# Altium PCB Bevattningssystem Design 2.PcbDoc
Units mm, origin at the board's own origin, x right, y up, seen from the top; angles counter-clockwise.
Board outline 152.4 x 101.6 mm, 2 copper layers (Top Layer, Bottom Layer); 41 components, 30 nets, 155 pads, 8 vias.
Unrouted connection lines stored in the file: 23.
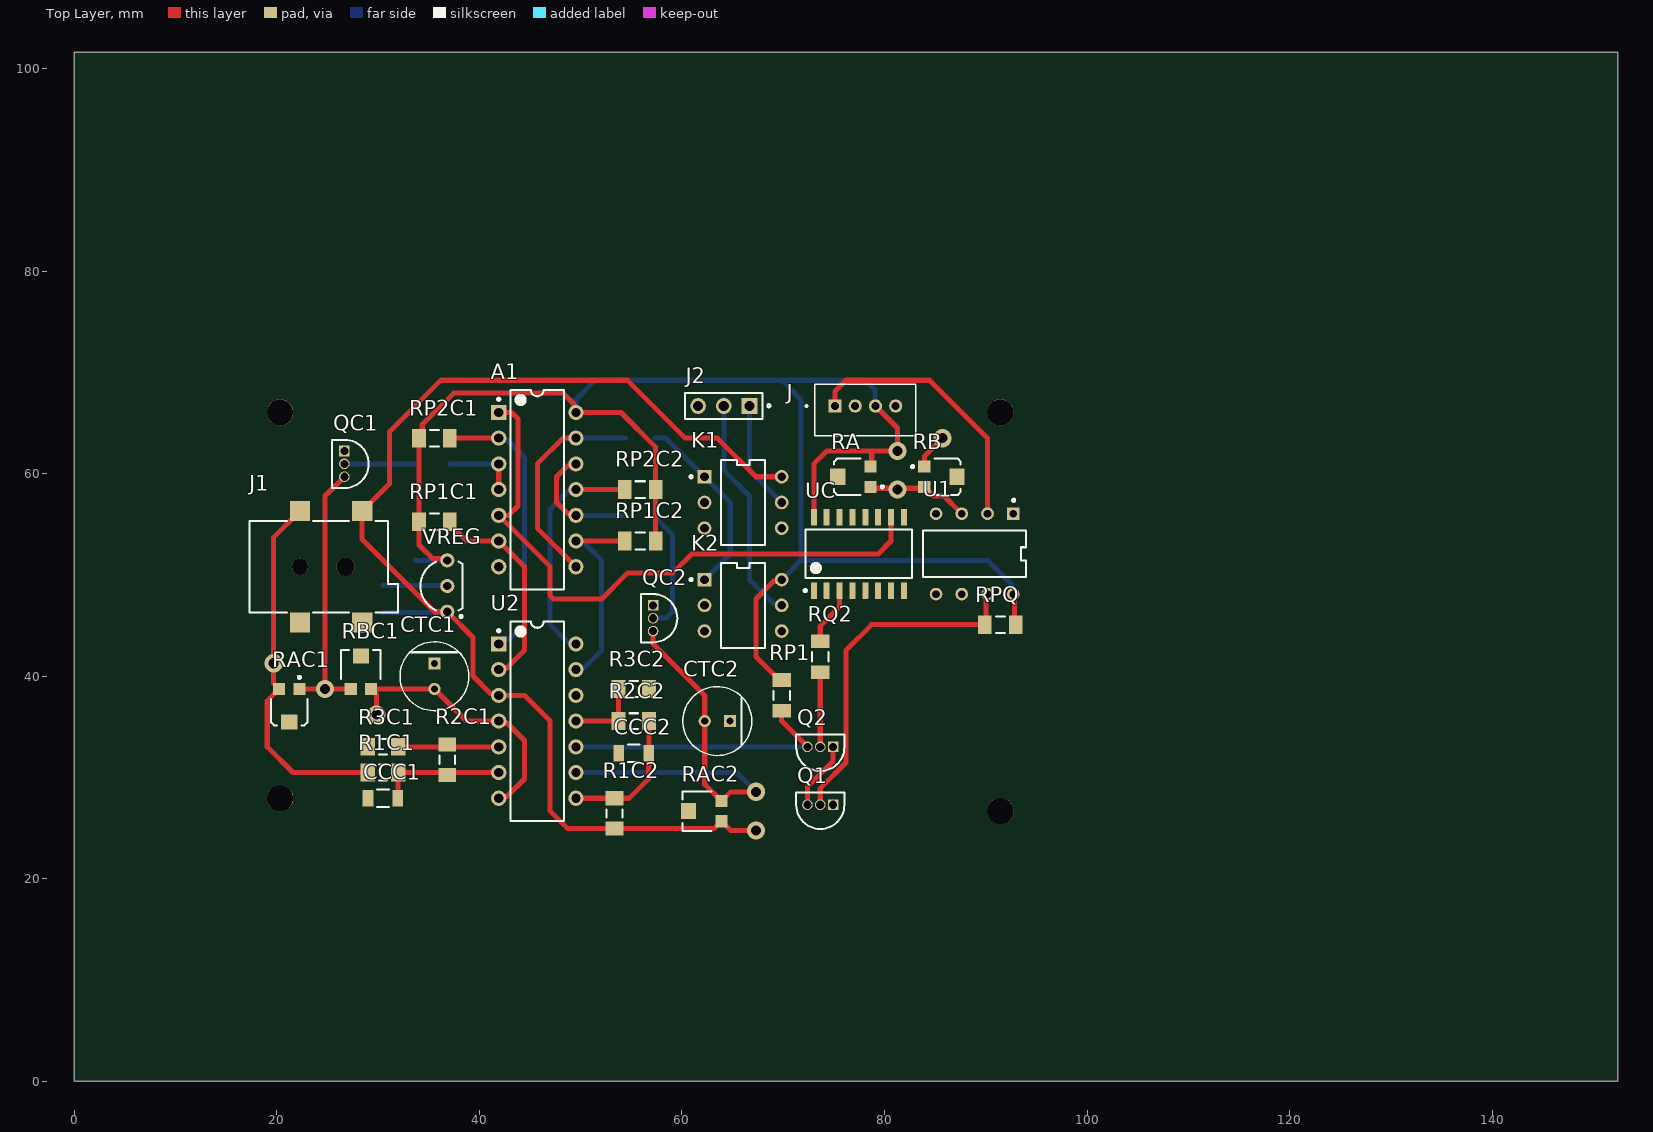
[diagram p0: Top Layer view]
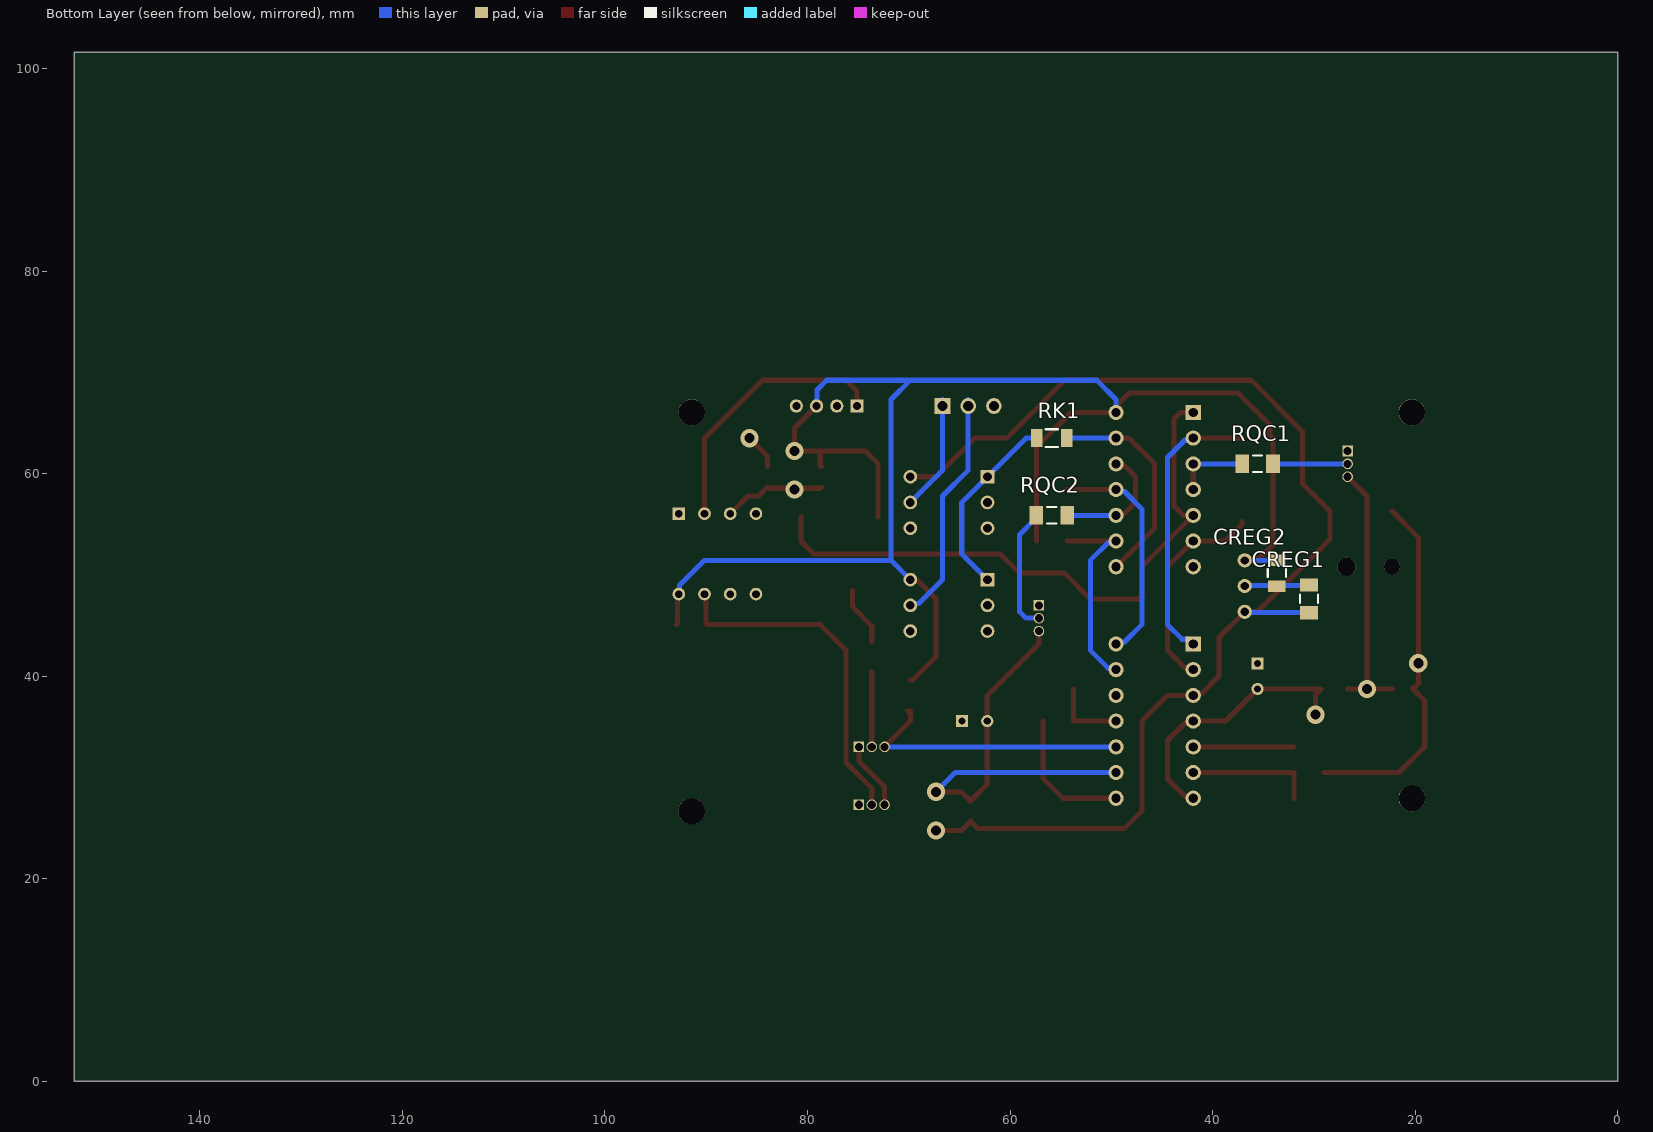
[diagram p1: Bottom Layer view, seen from below]
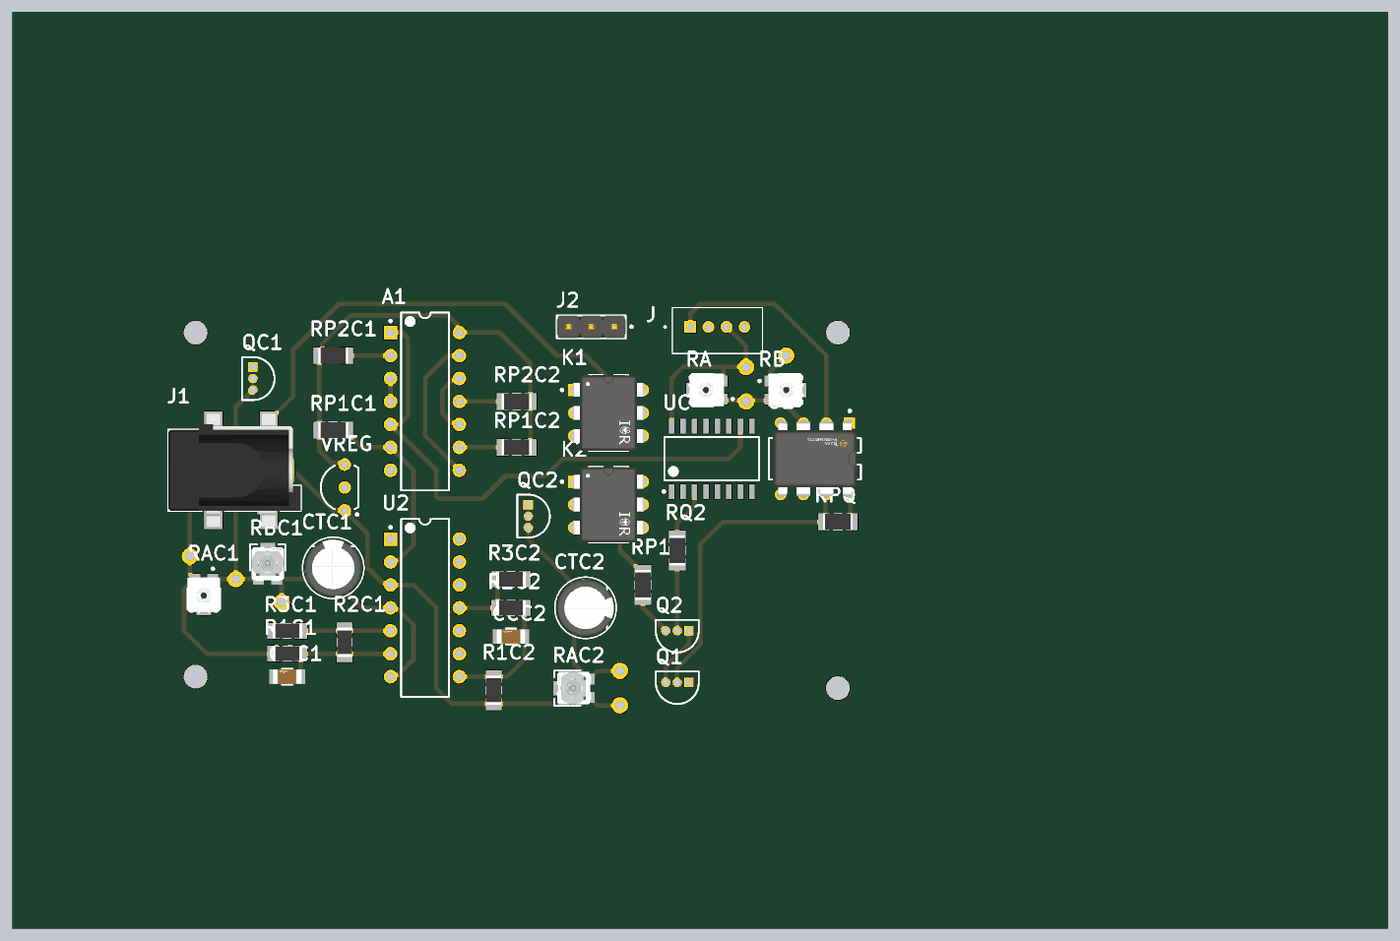
[diagram p2: 3D render of the assembled board from above, using the file's embedded part models]
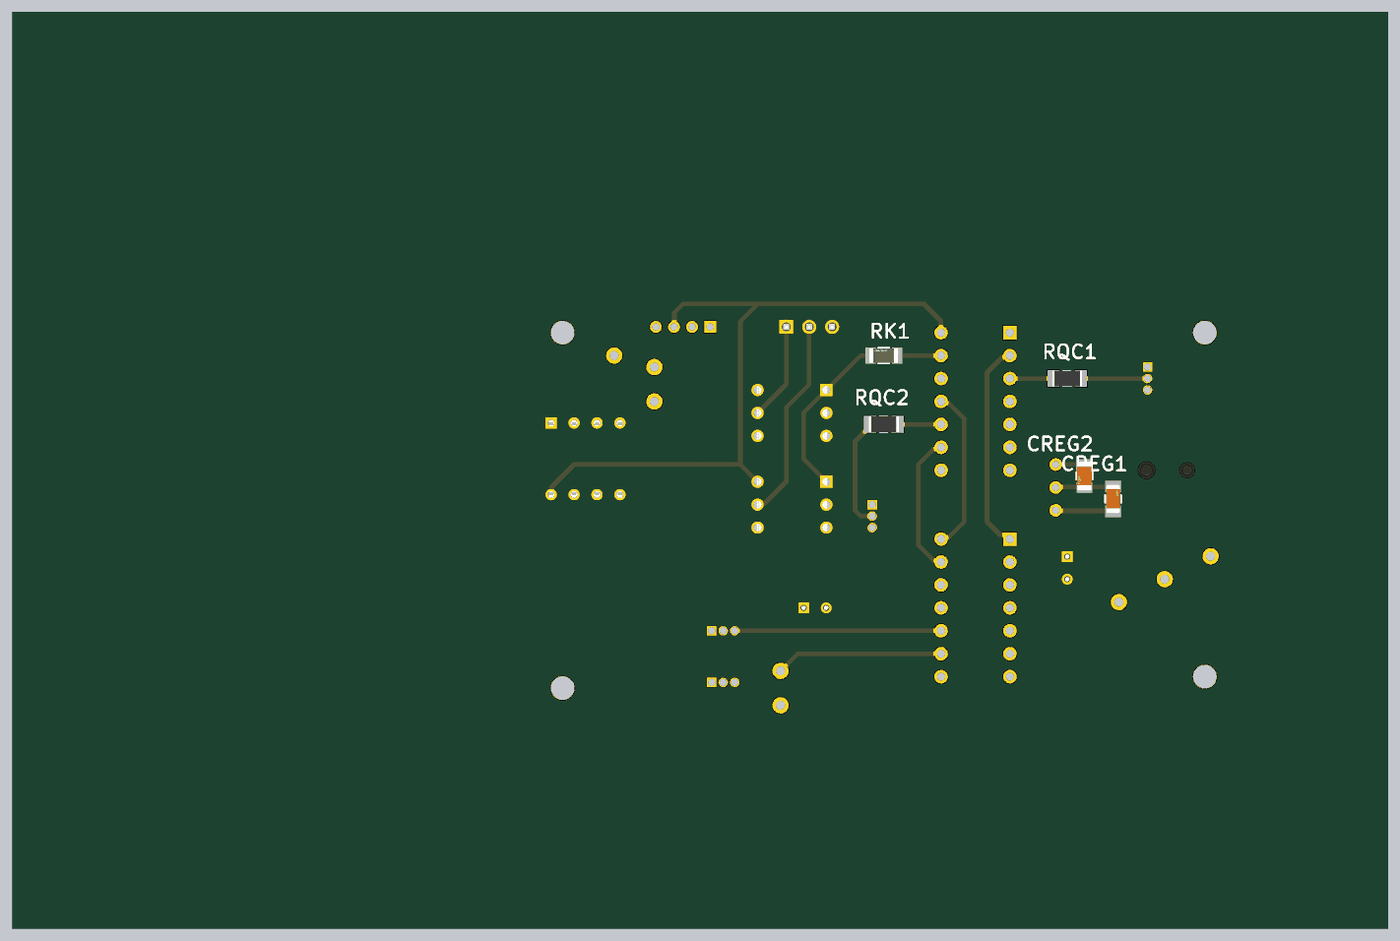
[diagram p3: 3D render of the assembled board from below, using the file's embedded part models]

## Layer stack, top to bottom
Top Solder: solder mask 0.0102, Solder Resist, Dk 3.5
Top Layer: signal copper 0.0356
Dielectric 1: dielectric 0.32, FR-4, Dk 4.8
Bottom Layer: signal copper 0.0356
Bottom Solder: solder mask 0.0102, Solder Resist, Dk 3.5

## Board outline
0,0 152.4,0 152.4,101.6 0,101.6

## Design rules (kind name [scope] priority, off if disabled: settings)
Clearance [All] p1: gap=0.5 ignorepadtopadclearanceinfootprint=FALSE
MinimumAnnularRing [All] p1: minimumring=0.5
PolygonConnect [All] p1: connectstyle=Relief reliefconductorwidth=0.254 reliefentries=4 polygonreliefangle="90 Angle" airgapwidth=0.254
RoutingVias [All] p1: holewidth=0.6 width=1 viastyle="Through Hole" minholewidth=0.6 minwidth=1 maxholewidth=0.6 maxwidth=1
SolderMaskExpansion [All] p1: expansion=0.102 istentingtop=FALSE
Width "Width PWR" [InNetClass('Power')] p1: maxlimit=0.5 minlimit=0.5 preferedwidth=0.5
Width [All] p2: maxlimit=0.5 minlimit=0.25 preferedwidth=0.5
30 further rules are at their usual default settings.

## Classes and differential pairs
net class RPQ_Nets: NetQ1_2 VCC5
net class J1_Nets: GND NetJ1_3 VCC
net class CREG2_Nets: GND VCC5
net class VREG_Nets: GND VCC VCC5
net class UC_Nets: GND NetRQ2_1 NetUC_1 NetUC_2 NetUC_4 NetUC_5 NetUC_6 NetUC_7 NetUC_9 NetUC_12 NetUC_13 NetUC_14 NetUC_15 "Signal Out c1" VCC5
net class U2_Nets: "Control c1" "Control c2" "Discharge c2" GND NetA1_2 NetA1_6 NetA1_9 NetA1_11 NetQ2_3 NetR2C1_2 NetR2C2_2 NetU2_3 NetU2_12 "Threshold c1" VCC
net class U1_Nets: GND NetQ1_2 NetRA_1 NetU1_1 NetU1_5 NetU1_8 Sensor VCC5
net class RQC2_Nets: NetQC2_2 ~QC2
net class RQC1_Nets: NetQC1_2 ~QC1
net class RQ2_Nets: NetQ2_2 NetRQ2_1
net class RP2C2_Nets: NetA1_11 VCC5
net class RP2C1_Nets: NetA1_2 VCC5
net class RP1C2_Nets: NetA1_9 VCC5
net class RP1C1_Nets: NetA1_6 VCC5
net class RP1_Nets: NetQ2_3 VCC5
net class RK1_Nets: NetK1_1 "Signal Out c2"
net class RBC1_Nets: "Discharge c1" NetRBC1_2 "Threshold c1"
net class RB_Nets: GND NetRA_1 NetRB_2
net class RAC2_Nets: "Discharge c2" NetRAC2_2 VCC
net class RAC1_Nets: "Discharge c1" NetRAC1_2 VCC
net class RA_Nets: NetRA_1 NetRA_2 VCC5
net class R3C2_Nets: GND NetR2C2_2
net class R3C1_Nets: GND NetR2C1_2
net class R2C2_Nets: "Control c2" NetR2C2_2
net class R2C1_Nets: "Control c1" NetR2C1_2
net class R1C2_Nets: "Control c2" VCC
net class R1C1_Nets: "Control c1" VCC
net class QC2_Nets: "Discharge c2" GND NetQC2_2
net class QC1_Nets: "Discharge c1" GND NetQC1_2
net class Q2_Nets: NetQ1_3 NetQ2_2 NetQ2_3
net class Q1_Nets: GND NetQ1_2 NetQ1_3
net class K2_Nets: GND NetJ2_2 NetK1_1 NetK2_3 VCC5
net class K1_Nets: GND NetJ2_1 NetK1_1 VCC
net class J_Nets: GND Sensor VCC5
net class J2_Nets: GND NetJ2_1 NetJ2_2
net class CREG1_Nets: GND NetJ1_3 VCC
net class CTC2_Nets: "Discharge c2" GND
net class CTC1_Nets: GND "Threshold c1"
net class CCC2_Nets: "Control c2" GND
net class CCC1_Nets: "Control c1" GND
net class A1_Nets: GND NetA1_2 NetA1_6 NetA1_9 NetA1_11 "Signal Out c1" "Signal Out c2" VCC5 ~QC1 ~QC2

## Components (designator, comment, footprint, x,y, rotation, side; value= is the part's Value field where it differs from the comment)
A1 "SN74HCT02N" N0014A 45.72,58.42 r0 top
CCC1 "GCM3195C2A103JA16D" FP-GCM319-0_15-MFG 30.48,27.94 r180 top
CCC2 "GCM3195C2A103JA16D" FP-GCM319-0_15-MFG 55.245,32.385 r180 top
CREG1 "GCM31MR91H334KA37L" FP-GCM31M-0_15-IPC_B 30.48,47.625 r90 bottom value=330nF
CREG2 "GRM31C5C1H104JA01L" FP-GRM31C-0_2-e0_3_0_8-IPC_C 33.655,50.165 r270 bottom value=100nF
CTC1 "ECA1EHG101I" FP-RAD-TH-D_6_3_0_5-L_11-MFG 35.56,39.985 r270 top
CTC2 "ECA1EHG101I" FP-RAD-TH-D_6_3_0_5-L_11-MFG 63.5,35.56 r180 top
J "Grove B4B" SEEED_110990030 78.105,66.675 r0 top
J1 "694106106102" 694106106102 24.13,50.8 r270 top
J2 "90120-0763" FP-90120-0763-MFG 64.135,66.675 r180 top
K1 "PVT412LPBF" FP-PG-DIP-6-MFG 66.04,57.15 r0 top
K2 "PVT412LPBF" FP-PG-DIP-6-MFG 66.04,46.99 r0 top
Q1 "2N3904BU" FAIR-TO-92 74.93,27.305 r180 top
Q2 "2N3904BU" FAIR-TO-92 74.93,33.02 r180 top
QC1 "2N3904BU" FAIR-TO-92 26.67,62.23 r270 top
QC2 "2N3904BU" FAIR-TO-92 57.15,46.99 r270 top
R1C1 "Resistor 4k7 +/-1% 1206 250 mW" RESC3116X70X50ML13T20 30.48,30.48 r0 top value=4.7k
R1C2 "Resistor 4k7 +/-1% 1206 250 mW" RESC3116X70X50ML13T20 53.34,26.44 r90 top value=4.7k
R2C1 "Resistor 4k7 +/-1% 1206 250 mW" RESC3116X70X50ML13T20 36.83,31.75 r90 top value=4.7k
R2C2 "Resistor 4k7 +/-1% 1206 250 mW" RESC3116X70X50ML13T20 55.245,35.56 r180 top value=4.7k
R3C1 "Resistor 4k7 +/-1% 1206 250 mW" RESC3116X70X50ML13T20 30.48,33.02 r180 top value=4.7k
R3C2 "Resistor 4k7 +/-1% 1206 250 mW" RESC3116X70X50ML13T20 55.245,38.735 r0 top value=4.7k
RA "TC33X-2-103E" BOUR-TC33X-2_V 76.835,59.69 r180 top value=10k
RAC1 "TC33X-2-103E" BOUR-TC33X-2_V 21.225,36.935 r270 top value=10k
RAC2 "TC33X-2-104E" FP-TC33X-2-MFG 62.23,26.67 r90 top value=100k
RB "TC33X-2-103E" BOUR-TC33X-2_V 85.725,59.69 r0 top value=10k
RBC1 "TC33X-2-104E" FP-TC33X-2-MFG 28.305,40.41 r0 top value=100k
RK1 "RC3216J221CS" FP-RC3216-IPC_B 55.88,63.5 r0 bottom value=220
RP1 "Resistor 10k +/-1% 1206 250 mW" RESC3216X60X45ML15T20 69.85,38.1 r270 top value=10k
RP1C1 "Resistor 10k +/-1% 1206 250 mW" RESC3216X60X45ML15T20 35.56,55.245 r0 top value=10k
RP1C2 "Resistor 10k +/-1% 1206 250 mW" RESC3216X60X45ML15T20 55.88,53.34 r180 top value=10k
RP2C1 "Resistor 10k +/-1% 1206 250 mW" RESC3216X60X45ML15T20 35.56,63.5 r0 top value=10k
RP2C2 "Resistor 10k +/-1% 1206 250 mW" RESC3216X60X45ML15T20 55.88,58.42 r180 top value=10k
RPQ "Resistor 10k +/-1% 1206 250 mW" RESC3216X60X45ML15T20 91.44,45.085 r180 top value=10k
RQ2 "Resistor 10k +/-1% 1206 250 mW" RESC3216X60X45ML15T20 73.66,41.91 r270 top value=10k
RQC1 "Resistor 10k +/-1% 1206 250 mW" RESC3216X60X45ML15T20 35.56,60.96 r180 bottom value=10k
RQC2 "Resistor 10k +/-1% 1206 250 mW" RESC3216X60X45ML15T20 55.88,55.88 r0 bottom value=10k
U1 "LM311P" FP-P0008A-MFG 88.9,52.07 r270 top
U2 "LM339AN" TI-N0014A 45.72,35.56 r0 top
UC "CD4020BNSR" NS0016A_N 77.47,52.07 r90 top
VREG "UA78M05CKCSE3" LP3 36.83,48.895 r0 top

## Footprints (in the part's own frame and the unit in brackets; to place one, negate y for a bottom-side part, rotate by r counter-clockwise, add the part's x,y. Pads: shape width x height; smd on the part's side, far side on the other; paste and mask are expansions set on the pad)
694106106102 [mm] "DC Power Jack Right Angled SMT ?6.4 with 4 soldering pads & pegs"
  rect 2x2 smd: 1(-5.5,4.3) 1(-5.5,-1.85) 2(5.5,-1.85) 3(5.5,4.3)
  round 1.6 hole 1.6 unplated: MH1(0,-1.85)
  round 1.8 hole 1.8 unplated: MH2(0,2.65)
  silkscreen extent -4.5,-6.85 4.5,7.85, body extent -6.25,-6.85 6.25,7.85, height 11.05
BOUR-TC33X-2_V [mm] "SMD, 3-Leads, Body 3.8x3.6mm"
  rect 1.2x1.2 smd: 1(-1.8,1) 3(-1.8,-1)
  rect 1.5x1.6 smd: 2(1.45,0)
  silkscreen extent -3.08,-1.8 1.8,1.8, body extent -2,-1.8 1.96,1.8, height 1.15
FAIR-TO-92 [mm] "TO, 3-Leads, Body Dia 4.79mm, Pitch 1.27mm"
  rect 1.05x1.05 hole 0.8 mask+0.05: 1(0,0)
  round 1.05 hole 0.8 mask+0.05: 2(1.27,0) 3(2.54,0)
  silkscreen extent -1.11,-1.21 3.65,2.4, body extent -1.11,-1.21 3.65,2.4, height 5.33
FP-90120-0763-MFG [mm]
  rect 1.55x1.55 hole 1 paste-2539.97 mask+0: 1(-2.54,0)
  round 1.55 hole 1 paste-2539.97 mask+0: 2(0,0) 3(2.54,0)
  silkscreen extent -4.58,-1.27 3.81,1.27, body extent -3.91,-1.37 3.91,1.37, height 0.25
FP-GCM31M-0_15-IPC_B [mm]
  rect 1.306x1.758 smd paste+0 mask+0: 1(-1.376,0) 2(1.376,0)
  silkscreen extent -0.42,-0.88 0.42,0.88, body extent -1.6,-0.8 1.6,0.8, height 1.25
FP-GCM319-0_15-MFG [mm]
  rect 1.05x1.6 smd paste+0 mask+0: 1(-1.475,0) 2(1.475,0)
  silkscreen extent -0.58,-0.87 0.58,0.87, body extent -2.1,-0.97 2.1,0.97, height 0.25
FP-GRM31C-0_2-e0_3_0_8-IPC_C [mm]
  rect 1.155x1.706 smd paste+0 mask+0: 1(-1.276,0) 2(1.276,0)
  silkscreen extent -0.4,-0.9 0.4,0.9, body extent -1.6,-0.8 1.6,0.8, height 1.8
FP-P0008A-MFG [mm]
  rect 1.25x1.25 hole 0.75 paste-1000 mask+0: 1(-3.97,3.81)
  round 1.25 hole 0.75 paste-1000 mask+0: 2(-3.97,1.27) 3(-3.97,-1.27) 4(-3.97,-3.81) 5(3.97,-3.81) 6(3.97,-1.27) 7(3.97,1.27) 8(3.97,3.81)
  silkscreen extent -5.42,-5.08 2.3,5.08, body extent -4.69,-5.18 4.69,5.18, height 0.25
FP-PG-DIP-6-MFG [mm]
  rect 1.35x1.35 hole 0.85 paste-2539.97 mask+0: 1(-3.81,2.54)
  round 1.35 hole 0.85 paste-2539.97 mask+0: 2(-3.81,0) 3(-3.81,-2.54) 4(3.81,-2.54) 5(3.81,0) 6(3.81,2.54)
  silkscreen extent -5.26,-4.19 2.17,4.19, body extent -4.58,-4.54 4.58,4.54, height 0.25
FP-RAD-TH-D_6_3_0_5-L_11-MFG [mm]
  rect 1.2x1.2 hole 0.7 paste-2539.97 mask+0: 1(-1.25,0)
  round 1.2 hole 0.7 paste-2539.97 mask+0: 2(1.25,0)
  silkscreen extent -3.4,-3.4 3.4,3.4, body extent -3.5,-3.5 3.5,3.5, height 0.25
FP-RC3216-IPC_B [mm]
  rect 1.155x1.758 smd paste+0 mask+0: 1(-1.476,0) 2(1.476,0)
  silkscreen extent -0.6,-0.88 0.6,0.88, body extent -1.6,-0.8 1.6,0.8, height 0.65
FP-TC33X-2-MFG [mm]
  rect 1.2x1.2 smd paste+0 mask+0: 1(-1,-1.675) 3(1,-1.675)
  rect 1.6x1.5 smd paste+0 mask+0: 2(0,1.575)
  silkscreen extent -1.95,-0.7 1.95,2.18, body extent -2.05,-2.37 2.05,2.42, height 0.25
LP3 [mm] "TO, Flat Index; 3 In-Line, Formed Axial Leads; Body Dia. 4.8mm; Leads 0.56 x 0.41 mm (max)"
  round 1.4 hole 0.8: 1(0,-2.54) 2(0,0) 3(0,2.54)
  silkscreen extent -2.65,-3.13 1.52,2.41, body extent -2.65,-2.66 1.52,2.66, height 9.33
N0014A [mm] "DIP, 14-Leads, Body 19.7x6.6mm, Pitch 2.54mm"
  rect 1.5x1.5 hole 0.9: 1(-3.81,7.62)
  round 1.5 hole 0.9: 2(-3.81,5.08) 3(-3.81,2.54) 4(-3.81,0) 5(-3.81,-2.54) 6(-3.81,-5.08) 7(-3.81,-7.62) 8(3.81,-7.62) 9(3.81,-5.08) 10(3.81,-2.54) 11(3.81,0) 12(3.81,2.54) 13(3.81,5.08) 14(3.81,7.62)
  silkscreen extent -3.93,-9.85 2.65,9.85, body extent -3.95,-9.85 3.95,9.85, height 5.08
NS0016A_N [mm] "SOIC,16-Leads,Body 10.5x5.6mm,Pitch 1.27mm,IPC Medium Density"
  rrect17% 1.65x0.6 smd: 1(-3.625,4.445) 2(-3.625,3.175) 3(-3.625,1.905) 4(-3.625,0.635) 5(-3.625,-0.635) 6(-3.625,-1.905) 7(-3.625,-3.175) 8(-3.625,-4.445) 9(3.625,-4.445) 10(3.625,-3.175) 11(3.625,-1.905) 12(3.625,-0.635) 13(3.625,0.635) 14(3.625,1.905) 15(3.625,3.175) 16(3.625,4.445)
  silkscreen extent -3.75,-5.25 2.4,5.42, body extent -2.8,-5.25 2.8,5.25, height 2
RESC3116X70X50ML13T20 [mm] "Chip Resistor, 2-Leads, Body 3.25x1.65mm, IPC Low Density"
  rect 1.4x1.75 smd: 1(-1.5,0) 2(1.5,0)
  silkscreen extent -0.4,-0.78 0.4,0.78, body extent -1.63,-0.82 1.63,0.82, height 0.7
RESC3216X60X45ML15T20 [mm] "Chip Resistor, 2-Leads, Body 3.3x1.75mm, IPC Low Density"
  rect 1.35x1.85 smd: 1(-1.525,0) 2(1.525,0)
  silkscreen extent -0.45,-0.82 0.45,0.82, body extent -1.65,-0.87 1.65,0.87, height 0.6
SEEED_110990030 [mm]
  rect 1.308x1.308 hole 0.8: 1(-3,0)
  round 1.308 hole 0.8: 2(-1,0) 3(1,0) 4(3,0)
  silkscreen extent -5.9,-2.95 5,2.15
TI-N0014A [mm] "DIP, 14-Leads, Body 19.7x6.6mm, Pitch 2.54mm"
  rect 1.5x1.5 hole 0.9: 1(-3.81,7.62)
  round 1.5 hole 0.9: 2(-3.81,5.08) 3(-3.81,2.54) 4(-3.81,0) 5(-3.81,-2.54) 6(-3.81,-5.08) 7(-3.81,-7.62) 8(3.81,-7.62) 9(3.81,-5.08) 10(3.81,-2.54) 11(3.81,0) 12(3.81,2.54) 13(3.81,5.08) 14(3.81,7.62)
  silkscreen extent -3.93,-9.85 2.65,9.85, body extent -3.95,-9.85 3.95,9.85, height 5.08

## Part data
A1: library part CMP-016-00012-1, "NOR Gate, HCT Series, 4-Func, 2-Input, CMOS, PDIP14", Case/Package=DIP, Load Capacitance (CL)=50pF, Max Operating Temperature=85°C, Max Supply Voltage=5.5V, Min Operating Temperature=-40°C, Min Supply Voltage=4.5V, Nominal Supply Voltage=5V, Package Body Material=Plastic, Package Equivalence Code=DIP14,.3, Package Shape=Rectangular, Package Style=IN-LINEMeter, Temperature Grade=INDUSTRIAL, Channels=4, Height - Seated (Max)=5.08mm, JESD-30 Code=R-PDIP-T14, JESD-609 Code=e4, Length=19.305mm, Logic Type="NOR GATE", Max I(ol)=4mA, Number of Inputs=2, Packaging=Rail/Tube, Pins=14, Power Supplies=5V, Prop. Delay@Nom-Sup=25ns, Propagation Delay (tpd)=25ns, Qualification Status="Not Qualified", Reach SVHC Compliant=Yes, RoHS Compliant=Yes, Schmitt Trigger=No, Surface Mount=No, Technology=CMOS, Terminal Finish=Nickel, Terminal Form="Through Hole", Terminal Pitch=2.54mm, Terminal Position=DUAL, Width=7.62mm
CCC1 CCC2: library part CMP-06035-000082-2, "Ceramic Capacitor for Automotive 10nF ±5% 100VDC C0G 1206 Paper T/R", Capacitance=10nF, Case Code (Imperial)=1206, Case Code (Metric)=3216, Dielectric=C0G, Max Operating Temperature=125°C, Min Operating Temperature=-55°C, Package Quantity=1, Ratings=AEC-Q200, Tolerance=5%, Voltage Rating=100V, Case/Package=1206, Depth=1.6mm, Height=0.85mm, Lead Free="Lead Free", Length=3.2mm, Mount="Surface Mount", Packaging="Tape and Reel", Radiation Hardening=No, Termination=SMD/SMT, Thickness=0.037inch, Voltage Rating (DC)=100V, Width=0.063inch
CREG1: library part CMP-001-00102-1, "Ceramic Capacitor, Multilayer, Ceramic, 50V, 10% +Tol, 10% -Tol, X8R, 15% TC, 0.33uF, Surface Mount, 1206", Capacitor Type=Ceramic, Case/Package=1206, Max Operating Temperature=150°C, Min Operating Temperature=-55°C, Package Shape=Rectangular, Rated DC Voltage (URdc)=50V, Temperature Characteristics Code=X8R, Tolerance  (fill in as +-)=10%, Dielectric Material=Ceramic, JESD-609 Code=e3, Mounting Technology="Surface Mount", Multilayer=Yes, Packaging="Tape and Reel", Pins=2, Reach SVHC Compliant=Yes, Reference Standard=AEC-Q200, RoHS Compliant=Yes, Terminal Finish=Nickel, Termination=Wraparound, Tolerance (fill in as +-)=10%
CREG2: library part CMP-001-00099-1, "Ceramic Capacitor, Non-polarized, Multilayer, Ceramic, 50V, 5% +Tol, 5% -Tol, C0G, 30ppm/Cel TC, 0.1uF, Surface Mount, 1206", Capacitor Type=Ceramic, Case/Package=1206, Max Operating Temperature=125°C, Min Operating Temperature=-55°C, Package Shape=Rectangular, Package Style=SMTMeter, Rated DC Voltage (URdc)=50V, Temperature Characteristics Code=C0G, Tolerance  (fill in as +-)=5%, Dielectric Material=Ceramic, Height=1.6mm, JESD-609 Code=e3, Length=3.2mm, Mounting Technology="Surface Mount", Multilayer=Yes, Packaging="Tape and Reel", Pins=2, Polarity=Non-Polarized, Reach SVHC Compliant=Yes, RoHS Compliant=Yes, Terminal Finish=Nickel, Termination=Wraparound, Tolerance (fill in as +-)=5%, Width=1.6mm
CTC1 CTC2: library part CMP-05427-000141-1, "Aluminum Electrolytic Capacitors (Radial Lead Type) AEC-Q200 Qualified 100uF ±20% 25V", Capacitance=100uF, Case/Package=Radial, Max Operating Temperature=105°C, Min Operating Temperature=-55°C, Package Quantity=2000, Ripple Current=130mA, Tolerance=20%, Voltage Rating=25V, Construction=RADIAL, Contact Plating=Tin, Diameter=6.3mm, Height=11.2mm, Height - Seated (Max)=0.48inch, Lead Diameter=0.5mm, Lead Pitch=2.5mm, Lead/Base Style=Straight, Length=11.2mm, Life (Hours)=1000Hour, Mount="Through Hole", Packaging="Ammo Pack", Radiation Hardening=No, RoHS Compliant=Yes, Series=NHG, Termination=Radial, Voltage Rating (DC)=25V, Width=6.3mm
J: "GROVE 2MM 4PIN VERT CONN 10PCS", Package=None, Arrow_Electronics-Purchase-URL=https://snapeda.com/shop?store=Arrow+Electronics&id=583576, Availability=Good, MF="Seeed Technology", Mouser-Purchase-URL=https://snapeda.com/shop?store=Mouser&id=583576, MP=110990030, Price=None, SnapEDA_Link=https://www.snapeda.com/parts/110990030/Seeed%20Technology%20Co.,%20Ltd/view-part/583576/?ref=snap
J1: library part CMP-1502-00177-3, Color=Black, Current Rating=5A, Flammability Rating="UL94 V-0", Insulation Resistance=100MΩ, Max Operating Temperature=85°C, Min Operating Temperature=-40°C, Operating Supply Voltage=24V, Connector Type=Power, Contact Gender=Female, Contact Material="Gold, Tin", Contact Plating=Tin, Gender=Male, Height=11.5mm, Housing Material=Polyamide, Mount="Surface Mount", NexarPartId=52645184, Number of Contacts=3, Packaging="Tape and Reel", REACH SVHC=Unknown, RoHS=Compliant, Shielding=Unshielded, Termination=SMD/SMT, Voltage Rating=24V, Voltage Rating (DC)=24V
J2: library part CMP-04776-000084-1, "CONN HEADER VERT 3POS 2.54MM", Current Rating=3A, Manufacturer=Molex, Temperature="-55°C to +125°C", Temperature Range High=+125°C, Temperature Range Low=-55°C, Voltage Rating=350V, Automotive=No, Category=Conn, ComponentLink2Description=Datasheet, ComponentLink2URL=https://www.molex.com/webdocs/datasheets/pdf/en-us/0901200763_PCB_HEADERS.pdf, Conn Gender=Male, Conn Orientation=Vertical, Contact Material=Gold,Nickel, Device Class L1=Connectors, Device Class L2="Headers and Wire Housings", Device Class L3=unset, Digikey Description="CONN HEADER VERT 3POS 2.54MM", Footprint Url=https://www.molex.com/pdm_docs/sd/901200763_sd.pdf, Height=5.8mm, Lead Free=Yes, Manufacturer Part Number=90120-0763, Mouser Description="Board-To-Board Connector, C-Grid III 90120 Series, Through Hole, Header, 3, 2.54 mm", Number of Contacts=3, Number Of Rows=1, Octopart=https://octopart.com/90120-0763-molex-655433, Package=90120-0763, Pitch=2.54mm, RoHS=TRUE
K1 K2: library part CMP-00196-65875632-1, "PVT412LPBF PVT Photovoltaic 400 V 0.12 A 35 Ohm SPST (1 Form A) Solid State Relay - DIP-6", Ambient Temperature Range High=85°C, Capacitance=12pF, Case/Package=DIP, Forward Current=25mA, Input Current=3mA, Insulation Resistance=10GΩ, Isolation Voltage=4kV, Load Current=120mA, Max Output Voltage=400V, Min Operating Temperature=-40°C, On-State Resistance=35Ω, Package Quantity=2000, Approvals=UL, Fall Time=500µs, Height=3.42mm, Lead Free="Contains Lead", Length=8.63mm, Lifecycle Status=Production, Max Input Current=25mA, Max Operating Temperature=85°C, Max Supply Voltage=400V, Mount="PCB, Through Hole", NexarPartId=65875632, Number of Channels=1, Number of Contacts=1, Number of Pins=6, Number of Poles=1, Output Current=120mA, Output Voltage=400V, Radiation Hardening=No, REACH SVHC="No SVHC", Relay Type=Relay, Resistance=35Ω, Rise Time=2ms, RMS Current (Irms)=120mA, RoHS=Compliant, Schedule B=8541408000, Termination="PC Pin", Throw Configuration="SP, SPST", Width=6.47mm
Q1 Q2 QC1 QC2: library part CMP-013-00040-1, "Small Signal Bipolar Transistor, 0.2A I(C), 40V V(BR)CEO, 1-Element, NPN, Silicon, TO-92", Collector-emitter Voltage-Max=40V, DC Current Gain-Min (hFE)=30, Frequency=300MHz, Max Collector Current=200mA, Max Operating Temperature=150°C, Package Body Material=Plastic, Package Shape=Round, Package Style=CYLINDRICALMeter, Power Dissipation-Max (Abs)=350mW, JEDEC-95 Code=TO-92, JESD-30 Code=O-PBCY-T3, Number of Elements=1, Pins=3, Polarity/Channel Type=NPN, Qualification Status="Not Qualified", Reach SVHC Compliant=Yes, RoHS Compliant=Yes, Surface Mount=No, Terminal Form="Through Hole", Terminal Position=BOTTOM, Transistor Application=SWITCHING, Transistor Element Material=SILICON, Turn-off Time-Max (toff)=250ns, Turn-on Time-Max (ton)=70ns
R1C1 R1C2 R2C1 R2C2 R3C1 R3C2: library part CMP-009-00033-5, "Chip Resistor, 4.7 KOhm, +/- 1%, 0.25 W, -55 to 155 degC, 1206 (3216 Metric)", Case/Package=1206, Max Operating Temperature=155°C, Min Operating Temperature=-55°C, Power=250mW, Tolerance=1%, Voltage Rating=200V, Mounting Technology=SM, Pins=2, RoHS Compliant=True
RA RAC1 RB: library part CMP-009-00213-1, "Trimmer, 0.1W, 10000ohm, 50V, 25% +/-Tol, -250,250ppm/Cel, 1 Turn(s), 1215", Case/Package=1215, Manufacturer Series=TC33, Max Operating Temperature=100°C, Min Operating Temperature=-40°C, Package Height=1.2mm, Package Length=3mm, Package Shape=Rectangular, Package Width=3.8mm, Power=100mW, Rated Temperature=70°C, Resistance Law=Linear, Resistor Type=TRIMMER, Temperature Coefficient (ppm/Cel)=-250,250, Tolerance=25%, Working Voltage=50V, Actuator Orientation=Vertical, Actuator Type=SCREW, Construction="Trimmer Pot", JESD-609 Code=e3, Mounting Technology="Surface Mount", Number of Turns=1, Packaging="Tape and Reel", Pins=3, Reach SVHC Compliant=Yes, RoHS Compliant=Yes, Series=TC33, Terminal Finish=Nickel, Termination=Wraparound
RAC2 RBC1: library part CMP-009-00214-1, "Trimmer, 0.1W, 100000ohm, 50V, 25% +/-Tol, -250,250ppm/Cel, 1 Turn(s), 1215", Case/Package=1215, Manufacturer Series=TC33, Max Operating Temperature=100°C, Min Operating Temperature=-40°C, Package Height=1.2mm, Package Length=3mm, Package Shape=Rectangular, Package Width=3.8mm, Power=100mW, Rated Temperature=70°C, Resistance Law=Linear, Resistor Type=TRIMMER, Temperature Coefficient (ppm/Cel)=-250,250, Tolerance=25%, Working Voltage=50V, Actuator Orientation=Vertical, Actuator Type=SCREW, Construction="Trimmer Pot", JESD-609 Code=e3, Mounting Technology="Surface Mount", Number of Turns=1, Packaging="Tape and Reel", Pins=3, Reach SVHC Compliant=Yes, RoHS Compliant=Yes, Series=TC33, Terminal Finish=Tin, Termination=Wraparound
RK1: library part CMP-009-00212-1, "Fixed Resistor, Metal Glaze/thick Film, 0.25W, 220ohm, 200V, 5% +/-Tol, 100ppm/Cel, Surface Mount, 1206", Case/Package=1206, Max Operating Temperature=155°C, Min Operating Temperature=-55°C, Package Height=0.55mm, Package Length=3.2mm, Package Shape=Rectangular, Package Width=1.6mm, Power=250mW, Rated Temperature=70°C, Resistor Type="FIXED RESISTOR", Temperature Coefficient (ppm/Cel)=100, Tolerance=5%, Working Voltage=200V, Construction=Chip, JESD-609 Code=e3, Mounting Technology="Surface Mount", Packaging="Tape and Reel", Pins=2, Reach SVHC Compliant=Yes, RoHS Compliant=Yes, Technology="METAL GLAZE/THICK FILM", Terminal Finish=Nickel
RP1 RP1C1 RP1C2 RP2C1 RP2C2 RQ2 RQC1 RQC2: library part CMP-009-00016-5, "Chip Resistor, 10 KOhm, +/- 1%, 0.25 W, -55 to 155 degC, 1206 (3216 Metric)", Case/Package=1206, Max Operating Temperature=155°C, Min Operating Temperature=-55°C, Power=250mW, Tolerance=1%, Voltage Rating=200V, Mounting Technology=SM, Pins=2, RoHS Compliant=True
RPQ: library part CMP-009-00016-5, "RP AND PQ1.  / Chip Resistor, 10 KOhm, +/- 1%, 0.25 W, -55 to 155 degC, 1206 (3216 Metric)", Case/Package=1206, Max Operating Temperature=155°C, Min Operating Temperature=-55°C, Power=250mW, Tolerance=1%, Voltage Rating=200V, Mounting Technology=SM, Pins=2, RoHS Compliant=True
U1: library part CMP-1685-00016-2, Ambient Temperature Range High=70°C, Case Code (Imperial)=0603, Case Code (Metric)=1608, Case/Package=PDIP, Dual Supply Voltage=9V, Input Bias Current=250nA, Input Offset Voltage (Vos)=2mV, Manufacturer Lifecycle Status=ACTIVE, Max Dual Supply Voltage=15V, Max Junction Temperature (Tj)=150°C, Max Output Voltage=7.5mV, Max Power Dissipation=500mW, Max Supply Current=7.5mA, Max Supply Voltage=30V, Min Dual Supply Voltage=1.75V, Min Operating Temperature=0°C, Min Supply Voltage=3.5V, Operating Supply Voltage=28V, Output Current=50mA, Power Rating=100mW, Resistance=390Ω, Tolerance=1%, Voltage Gain=106.02dB, Voltage Rating=75V, Contact Plating=Gold, Height=5.08mm, Lead Free="Lead Free", Length=9.81mm, Lifecycle Status=Production, Max Input Current=250nA, Max Operating Temperature=70°C, Mount="Surface Mount, Through Hole", NexarPartId=24336, Nominal Supply Current=7.5mA, Number of Channels=1, Number of Circuits=1, Number of Elements=1, Number of Pins=8, Output Current per Channel=50mA, Output Type=TTL, Packaging="Tape and Reel", Propagation Delay=115ns, Quiescent Current=7.5mA, Radiation Hardening=No, REACH SVHC="No SVHC", Response Time=165ns, RoHS=Compliant, Schedule B="8542390000, 8542390000", Thickness=3.9mm, Turn-On Delay Time=115ns, Type="General Purpose", Weight=2.012816mg, Width=6.35mm
U2: library part CMP-014-00014-2, "Quad Differential Comparator, 2 to 30 V, 0 to 70 degC, 14-Pin DIP (N), Pb-Free (RoHS), Tube", Case/Package=PDIP, Manufacturer="Texas Instruments (TI)", Max Dual Supply Voltage=15V, Max Operating Temperature=70°C, Max Supply Voltage=30V, Min Dual Supply Voltage=1V, Min Operating Temperature=0°C, Min Supply Voltage=2V, Nominal Supply Current=500uA, Nominal Voltage Gain=106.02dB, Package Description="14-Pin Double In-line Package, Body 19.305 x 6.35 mm, Pitch 2.54 mm", Package Quantity=25, Package Reference=N-14, Power=1.05W, Datasheet URL=http://www.ti.com/general/docs/lit/getliterature.tsp?genericPartNumber=LM339A&fileType=pdf, Datasheet Version="SLCS006S, 08/2012", Elements=4, Manufacturer URL=http://www.ti.com/, Mounting Technology=TH, Package URL=http://www.ti.com/lit/ml/mpdi002c/mpdi002c.pdf, Packaging=Rail/Tube, Pins=14, RoHS Compliant=True
UC: library part CMP-1623-00611-2, "CMOS 14-Stage Ripple-Carry Binary Counter/Divider, NS0016A, LARGE T&R", F @ Nom Voltage(Max)(Mhz)=8, Generic Part Number=CD4020B, ICC @ Nom Voltage(Max)(mA)=0.03, Manufacturer="Texas Instruments", Operating Temperature Range(C)="-55 to 125", Rating=Catalog, tpd @ Nom Voltage(Max)(ns)=160, Voltage(Nom)(V)=5,10,15, Bits(#)=12, DatasheetVersion=SCHS030D, Function=Counter, Input Type=CMOS, Inputs=1, Output Drive (IOL/IOH)(Max)(mA)=1.5/-1.5, Output Type=CMOS, PackageReference=NS0016A, Schmitt Trigger=No, Technology Family=CD4000, Type=Binary, VCC(Max)(V)=18, VCC(Min)(V)=3
VREG: library part CMP-0324-00077-1, "3/4 Pin 500mA Fixed 5V Positive Voltage Regulator", Manufacturer="Texas Instruments", Code_JEDEC=TO-226-AA, ComponentLink1Description=Datasheet, ComponentLink1URL=http://www.ti.com/general/docs/lit/getliterature.tsp?genericPartNumber=UA78M05&fileType=pdf, ComponentLink2Description="URL Link1", ComponentLink2URL="Samples URL:http://www.ti.com/product/ua78m05#samples", DatasheetVersion=SLVS059Q, Eco-Plan="Pb-Free (RoHS)", Iout(Max)(A)=0.5, Iq(Typ)(mA)=6, Mounting Technology="Through Hole", PackageDescription="Plastic Cylindrical Package, Formed Lead Option (TO-92)", PackageReference=LP3, PackageVersion="revC, Oct-2001", PartNumber=UA78M05CKCSE3, Vin(Max)(V)=25, Vin(Min)(V)=7, Vout(Max)(V)=5, Vout(Min)(V)=5

## Free pads (board coordinates)
  round 2.6 hole 2.6: "Mount BL"(20.32,27.94) "Mount BR"(91.44,26.67) "Mount TL"(20.32,66.04) "Mount TR"(91.44,66.04)

## Via types
v1: diameter 1.8, hole 1, Top Layer to Bottom Layer, 8 vias

## Nets (pads, with @x,y where several pads share a name; then routed paths per layer and width w, separated by ;. In a path a pad name is that pad's centre, name@x,y a point inside that pad or via, vN(x,y) a via of type N, cw(c..) or ccw(c..) an arc to the next point about the centre after c; other vN are vias at no path point)
"Control c1": CCC1.1 R1C1.2 R2C1.1 U2.6 | length 12.5
  Top Layer w0.5: CCC1.1 31.968,27.953 31.968,30.467 R1C1.2 U2.6
"Control c2": CCC2.1 R1C2.2 R2C2.1 U2.8 | length 13.7
  Top Layer w0.5: U2.8 R1C2.2 54.785,27.94 56.72,29.875 CCC2.1 56.733,32.398 56.733,35.547 R2C2.1
"Discharge c1": QC1.3 RAC1.1 RBC1.1 | length 26.2
  Top Layer w0.5: RAC1.1 v1(24.765,38.735) ; 26.67,38.735 v1(24.765,38.735) ; QC1.3 24.765,57.785 v1(24.765,38.735)
"Discharge c2": CTC2.2 QC2.3 RAC2.3 U2.9 | length 41.9
  Top Layer w0.5: QC2.3 57.155,44.445 57.155,43.175 62.25,38.08 CTC2.2 62.25,29.325 RAC2.3 64.81,28.575 v1(67.31,28.575)
  Bottom Layer w0.5: U2.9 65.405,30.48 v1(67.31,28.575)
GND: A1.7 CCC1.2 CCC2.2 CREG1.2 CREG2.2 CTC1.1 CTC2.1 J1.2 J2.3 J.2 J.4 K1.2 K1.4 K2.2 K2.4 Q1.1 QC1.1 QC2.1 R3C1.2 R3C2.2 RB.1 U1.4 U2.12 UC.8 UC.11 VREG.2 | length 9.9
  Top Layer w0.5: RB.1 83.972,60.737 83.972,61.747 v1(85.725,63.5)
  Bottom Layer w0.5: CREG1.2 30.533,48.948 36.777,48.948 VREG.2
NetA1_2: A1.2 RP2C1.2 U2.1 | length 28
  Top Layer w0.5: RP2C1.2 A1.2
  Bottom Layer w0.5: U2.1 42.373,43.643 43.008,43.643 44.45,45.085 44.45,61.595 42.736,63.309 42.101,63.309 A1.2
NetA1_6: A1.6 RP1C1.2 U2.2 | length 20.9
  Top Layer w0.5: RP1C1.2 37.085,54.995 38.74,53.34 A1.6 44.45,50.8 44.45,42.545 42.736,40.831 42.101,40.831 U2.2
NetA1_9: A1.9 RP1C2.2 U2.13 | length 20.4
  Top Layer w0.5: A1.9 RP1C2.2
  Bottom Layer w0.5: U2.13 49.721,40.831 50.356,40.831 52.07,42.545 52.07,51.435 50.356,53.149 49.721,53.149 A1.9
NetA1_11: A1.11 RP2C2.2 U2.14 | length 22.9
  Top Layer w0.5: A1.11 RP2C2.2
  Bottom Layer w0.5: U2.14 49.339,43.371 48.704,43.371 46.99,45.085 46.99,56.515 48.704,58.229 49.339,58.229 A1.11
NetJ2_1: J2.1 K1.5 | length 11.7
  Top Layer w0.5: K1.5@69.687,57.313 K1.5
  Bottom Layer w0.5: J2.1@66.675,67.31 66.675,60.325 K1.5
NetJ2_2: J2.2 K2.5 | length 23.1
  Bottom Layer w0.5: J2.2@64.135,67.31 64.135,60.325 66.675,57.785 66.675,49.53 69.052,47.153 69.687,47.153 K2.5
NetK1_1: K1.1 K2.1 RK1.2 | length 18.7
  Bottom Layer w0.5: RK1.2 58.42,63.5 K1.1 64.77,57.15 64.77,52.07 K2.1
NetQ1_2: Q1.2 RPQ.2 U1.7 | length 33.6
  Top Layer w0.5: 73.655,27.843 73.655,28.923 76.205,31.473 76.205,42.55 78.74,45.085 RPQ.2 90.042,45.212 90.042,47.972 U1.7
NetQ1_3: Q1.3 Q2.1 | length 6.1
  Top Layer w0.5: 72.39,27.94 72.39,29.072 74.93,31.612 Q2.1
NetQ2_2: Q2.2 RQ2.2 | length 7.4
  Top Layer w0.5: Q2.2 RQ2.2
NetQ2_3: Q2.3 RP1.2 U2.10 | length 27.7
  Top Layer w0.5: RP1.2@70.1,36.575 RP1.2 69.85,35.56 Q2.3
  Bottom Layer w0.5: U2.10 Q2.3@72.385,33.02
NetQC1_2: QC1.2 RQC1.2 | length 7.4
  Bottom Layer w0.5: QC1.2 RQC1.2
NetQC2_2: QC2.2 RQC2.2 | length 12.4
  Top Layer w0.5: QC2.2 QC2.2@57.155,45.715
  Bottom Layer w0.5: QC2.2 57.155,45.725 58.425,45.725 59.055,46.355 59.055,53.98 57.405,55.63 RQC2.2
NetR2C1_2: R2C1.2 R3C1.1 U2.5 | length 9.9
  Top Layer w0.5: R3C1.1 U2.5
NetR2C2_2: R2C2.2 R3C2.1 U2.11 | length 7.4
  Top Layer w0.5: U2.11 R2C2.2 R3C2.1
NetRA_1: RA.1 RB.3 U1.3 | length 10.3
  Top Layer w0.5: RA.1 78.77,58.555 81.145,58.555 v1(81.28,58.42) 81.415,58.555 83.79,58.555 RB.3 84.83,57.785 85.885,57.785 U1.3
NetRQ2_1: RQ2.1 UC.3 | length 5.8
  Top Layer w0.5: RQ2.1 73.66,44.938 75.565,46.843 UC.3
Sensor: J.1 U1.2 | length 26.8
  Top Layer w0.5: J.1 75.105,68.12 76.2,69.215 84.455,69.215 90.17,63.5 U1.2
"Signal Out c1": A1.1 A1.5 UC.10 | length 62.3
  Top Layer w0.5: A1.1@42.373,65.577 A1.1 43.18,66.04 43.815,65.405 43.815,56.808 42.887,55.88 A1.5 46.99,50.8 46.99,47.918 47.283,47.625 52.07,47.625 54.61,50.165 59.055,50.165 60.96,52.07 79.375,52.07 80.645,53.34 UC.10
"Signal Out c2": A1.8 A1.13 RK1.1 | length 21.5
  Top Layer w0.5: A1.8 45.72,54.61 45.72,60.96 48.26,63.5 A1.13
  Bottom Layer w0.5: A1.13 RK1.1
"Threshold c1": CTC1.2 RBC1.3 U2.4 U2.7 | length 27.2
  Top Layer w0.5: v1(29.845,36.195) 29.845,38.195 RBC1.3 CTC1.2 38.735,35.56 U2.4 42.101,35.369 42.736,35.369 44.45,33.655 44.45,29.845 42.736,28.131 42.101,28.131 U2.7
VCC: CREG1.1 J1.1 K1.6 R1C1.1 R1C2.1 RAC1.3 RAC2.1 U2.3 VREG.1 | length 157.9
  Top Layer w0.5: RAC1.3 19.685,39.275 19.685,53.705 J1.1@22.28,56.3 ; RAC1.3@20.273,38.782 19.05,37.56 19.05,33.02 21.59,30.48 R1C1.1 ; v1(67.31,24.765) 64.81,24.765 RAC2.1 63.175,24.94 R1C2.1 48.72,24.94 46.99,26.67 46.99,35.56 44.45,38.1 U2.3 41.719,38.291 41.084,38.291 39.36,40.015 39.36,43.825 VREG.1 35.56,46.355 28.43,53.485 28.43,56.3 31.115,58.985 31.115,64.135 36.195,69.215 54.61,69.215 60.325,63.5 63.5,63.5 67.31,59.69 K1.6
  Bottom Layer w0.5: CREG1.1 30.533,46.302 36.777,46.302 VREG.1
  other v1: 19.685,41.275
VCC5: A1.14 CREG2.1 J.3 K2.6 RA.3 RP1.1 RP1C1.1 RP1C2.1 RP2C1.1 RP2C2.1 RPQ.1 U1.8 UC.16 VREG.3 | length 168.4
  Top Layer w0.5: VREG.3 36.658,51.607 35.388,51.607 34.035,52.96 RP1C1.1 RP2C1.1 34.358,63.823 34.358,64.838 37.465,67.945 48.26,67.945 49.339,66.866 49.339,66.231 A1.14 53.975,66.04 57.405,62.61 RP2C2.1 RP1C2.1 ; RP1.1 69.6,39.625 67.31,41.915 67.31,47.625 69.052,49.367 69.687,49.367 K2.6 ; UC.16 73.025,60.96 74.295,62.23 78.74,62.23 ; RA.3 78.74,60.795 78.74,62.23 ; J.3 81.28,64.5 v1(81.28,62.23) 78.74,62.23 ; U1.8 92.838,47.972 92.838,45.213 RPQ.1
  Bottom Layer w0.5: CREG2.1 33.658,51.438 36.827,51.438 VREG.3 ; A1.14 49.53,67.31 51.435,69.215 69.85,69.215 ; K2.6 71.755,51.435 ; J.3@79.105,67.31 79.065,67.35 79.065,68.255 78.105,69.215 69.85,69.215 ; U1.8 92.635,48.175 92.635,48.97 90.17,51.435 71.755,51.435 ; 69.85,69.215 71.755,67.31 71.755,51.435
~QC1: A1.3 A1.4 RQC1.1 | length 7.4
  Top Layer w0.5: A1.4 A1.3
  Bottom Layer w0.5: RQC1.1 A1.3
~QC2: A1.10 A1.12 RQC2.1 | length 12.2
  Top Layer w0.5: A1.10 49.339,56.071 48.704,56.071 47.625,57.15 47.625,59.69 48.704,60.769 49.339,60.769 A1.12
  Bottom Layer w0.5: A1.10 RQC2.1
pads on no net: J1.3 J1.MH1 J1.MH2 K1.3 K2.3 RA.2 RAC1.2 RAC2.2 RB.2 RBC1.2 U1.1 U1.5 U1.6 UC.1 UC.2 UC.4 UC.5 UC.6 UC.7 UC.9 UC.12 UC.13 UC.14 UC.15